# Altium PCB PCB3.PcbDoc
Units mil, origin at the board's own origin, x right, y up, seen from the top; angles counter-clockwise.
Board outline 3937.01 x 3149.61 mil, 2 copper layers (Top Layer, Bottom Layer); 68 components, 73 nets, 259 pads, 40 vias.
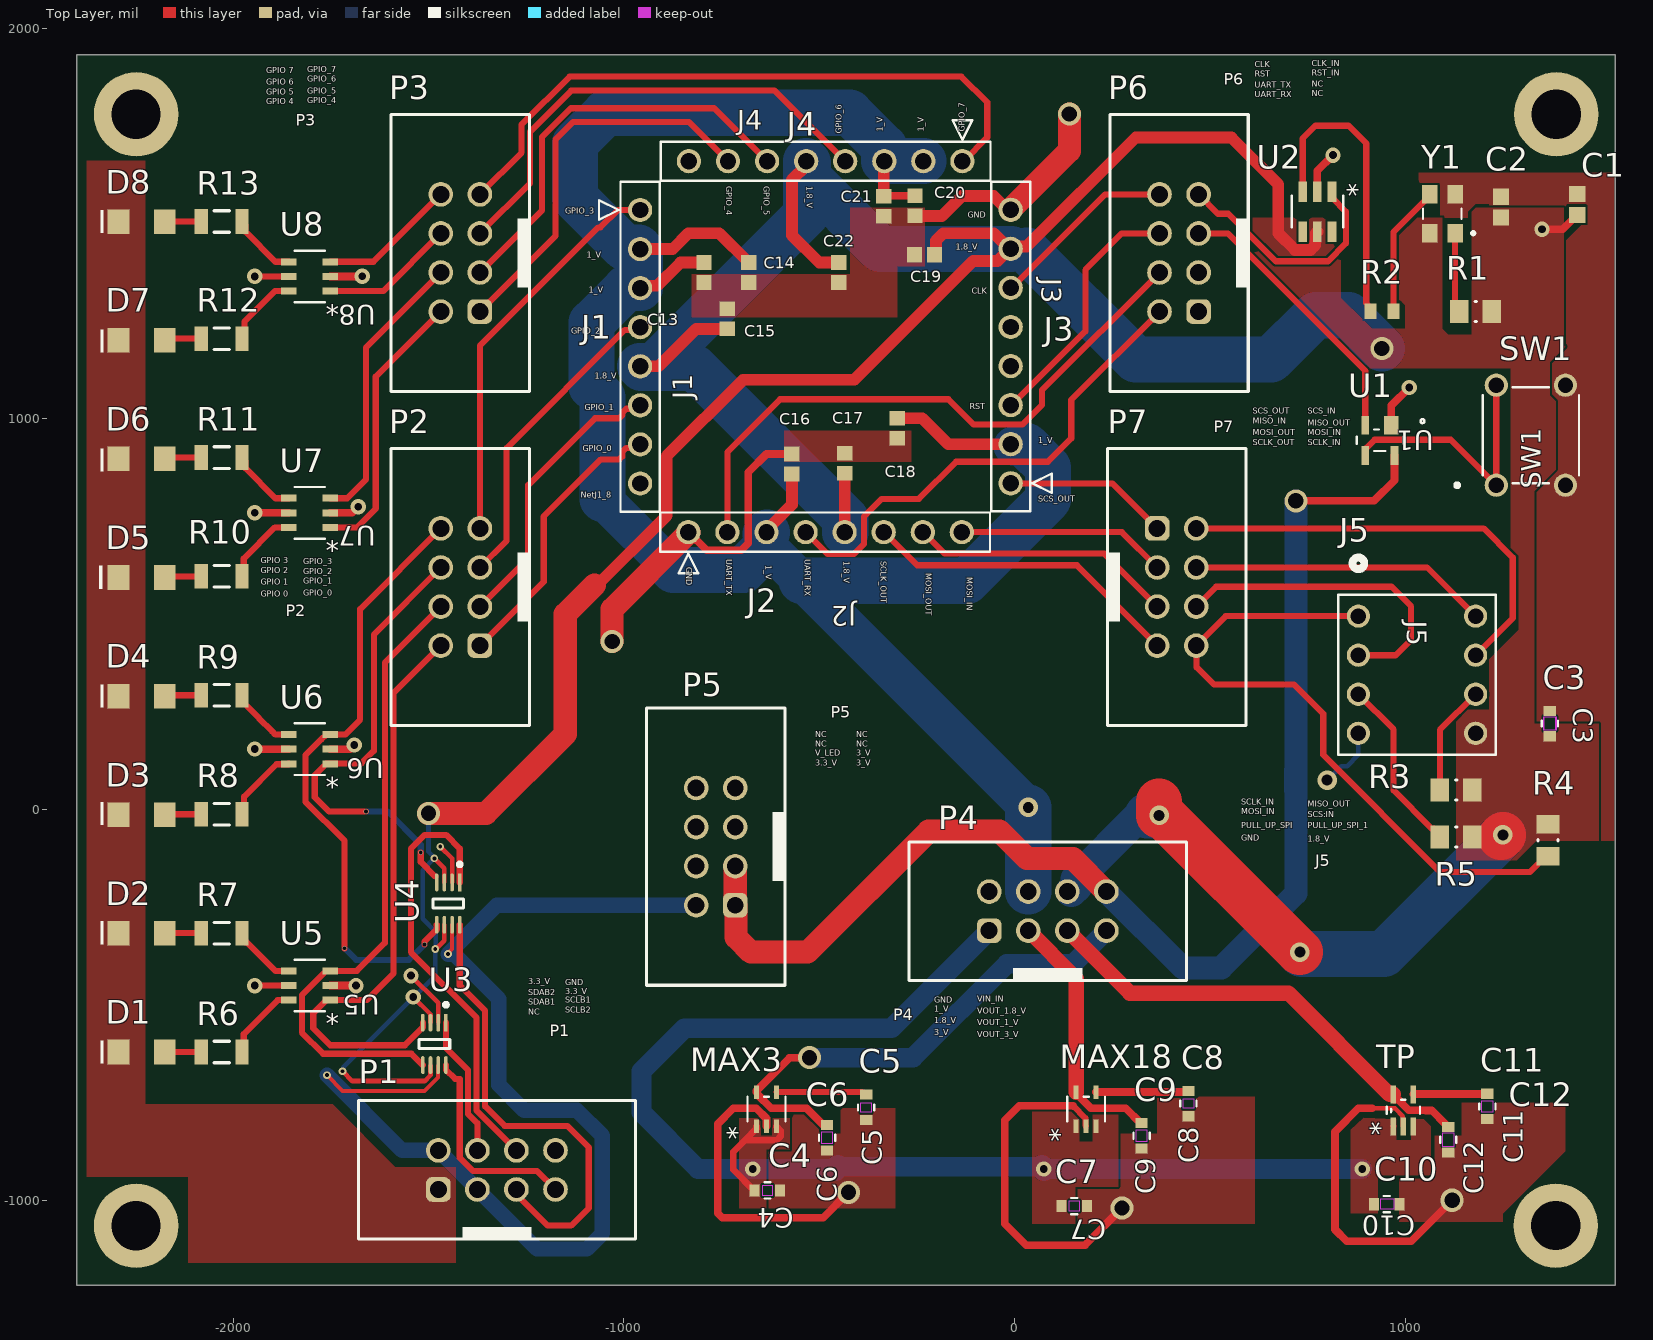
[diagram p0: Top Layer view]
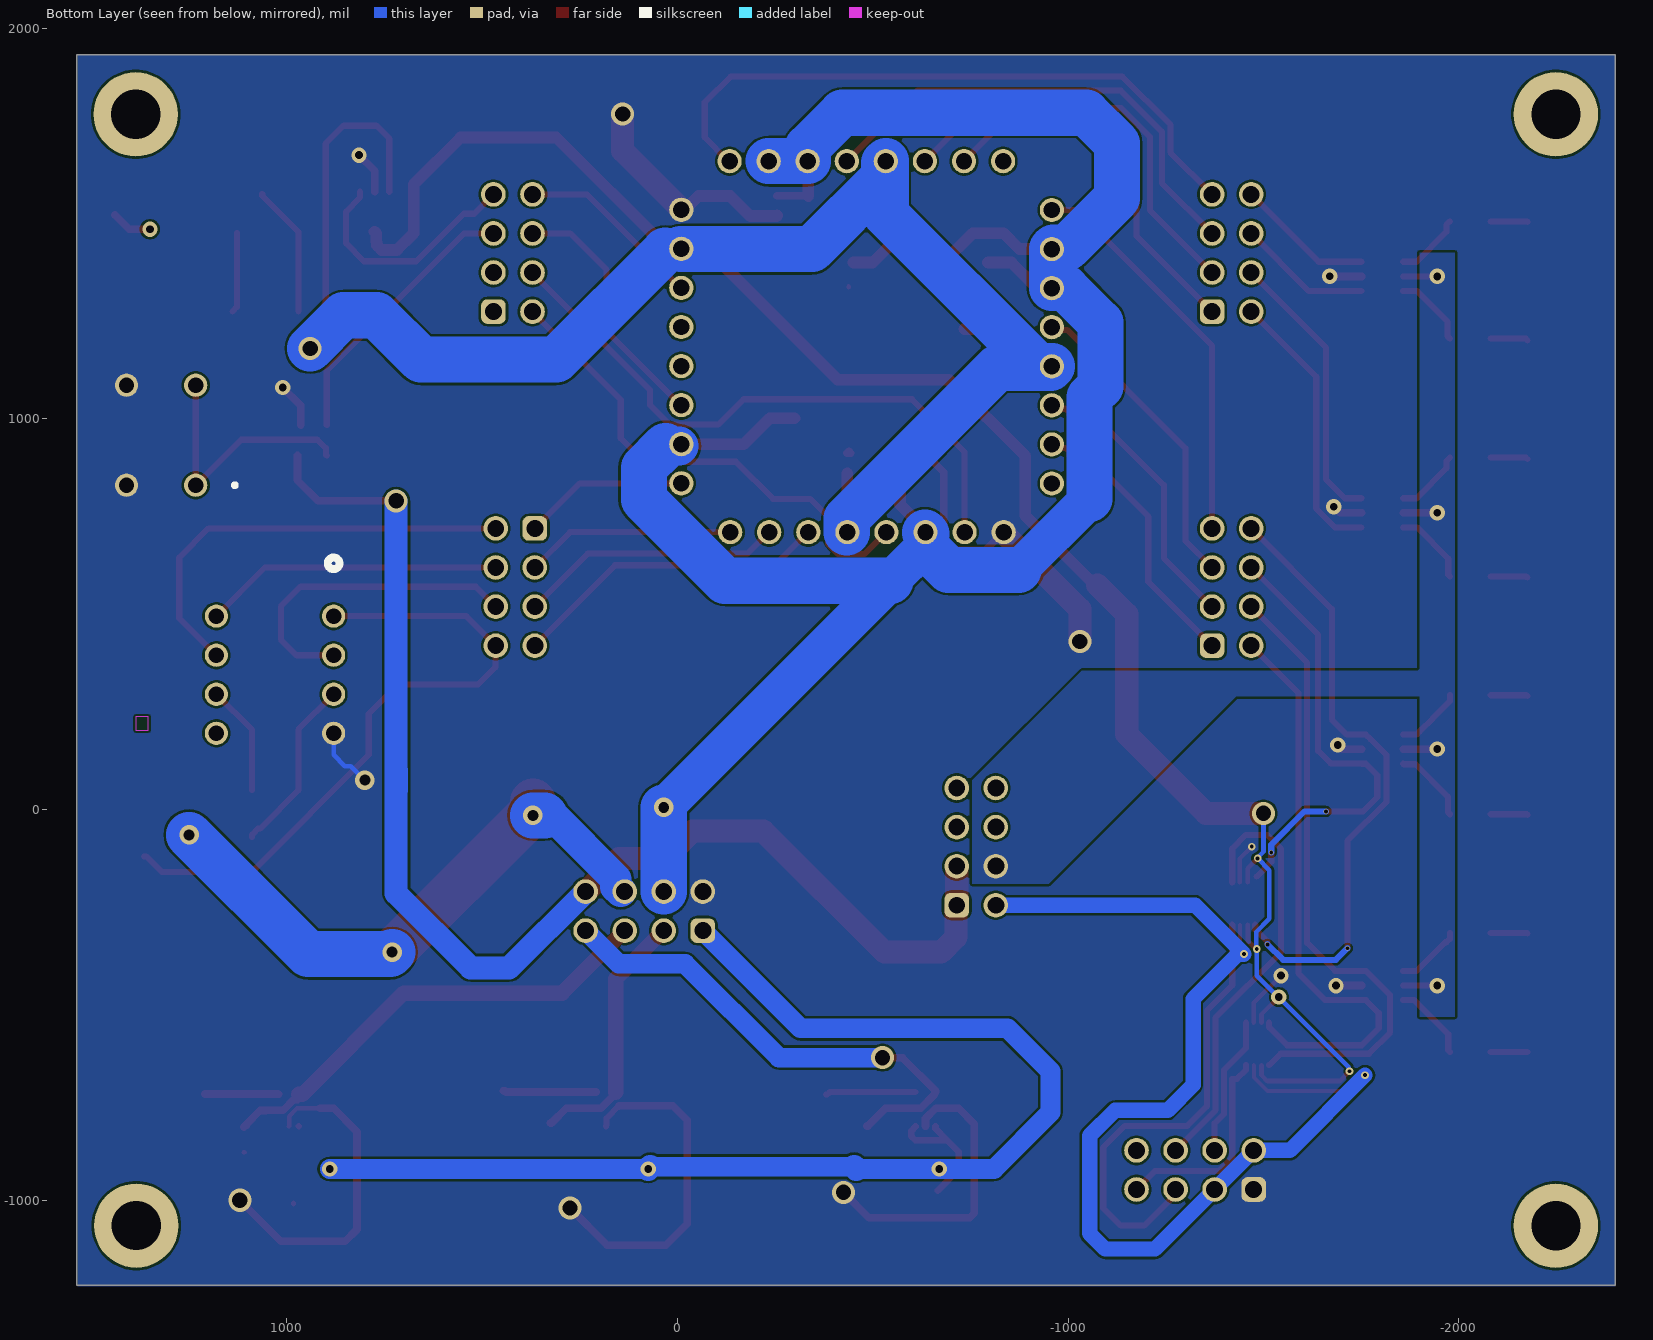
[diagram p1: Bottom Layer view, seen from below]
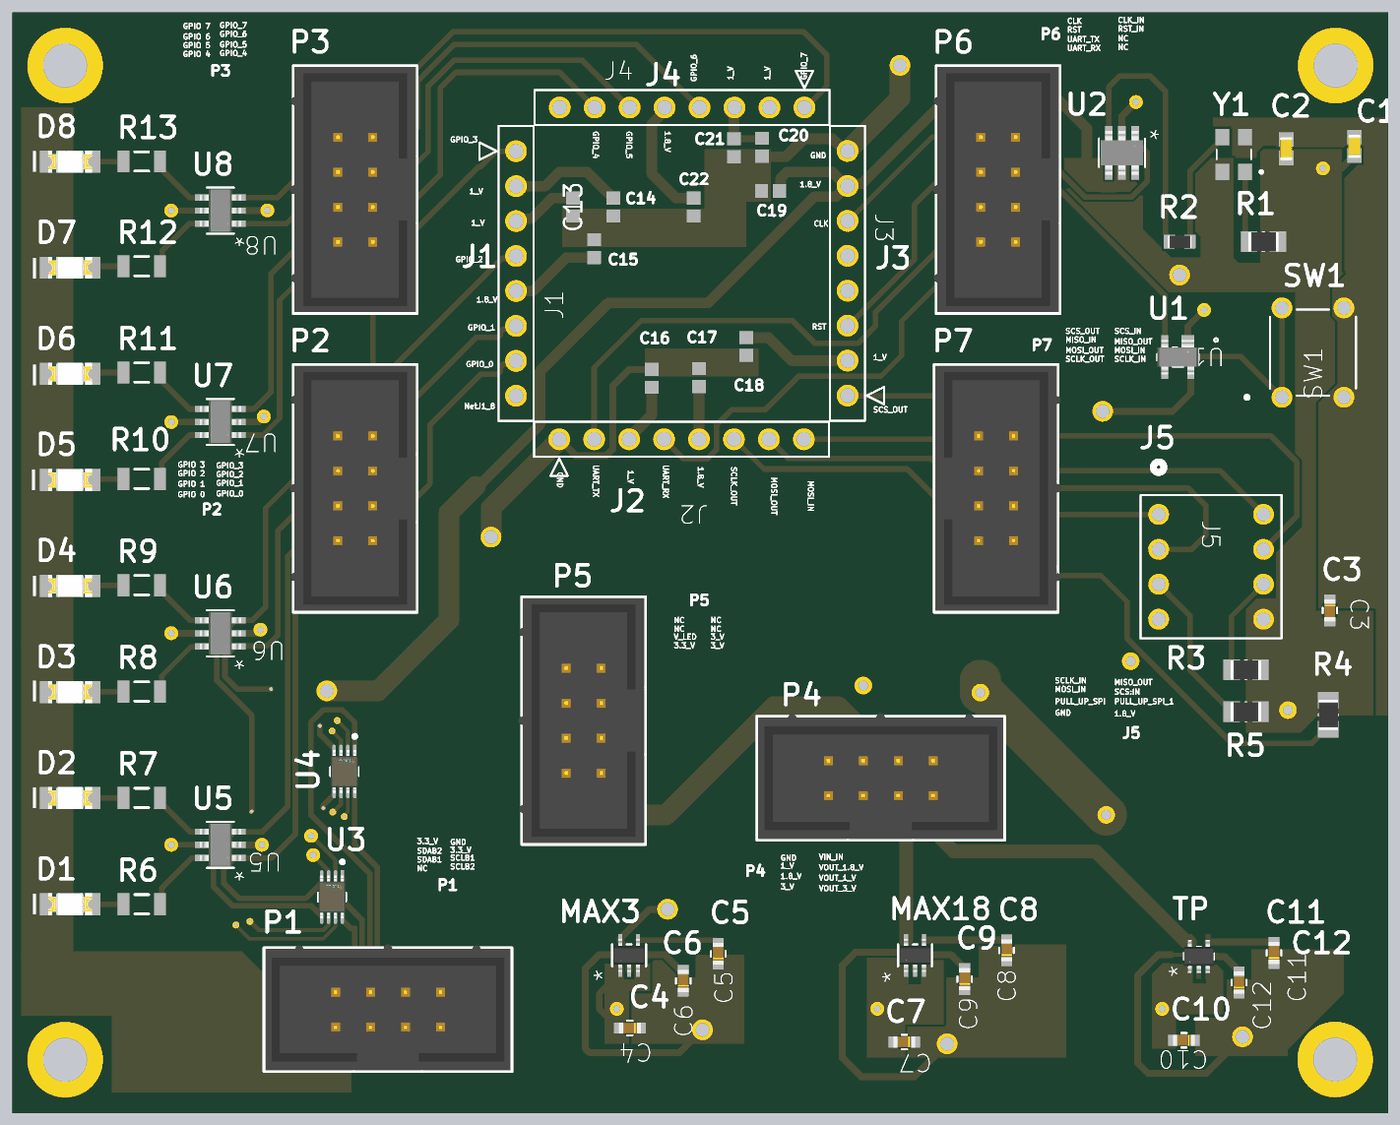
[diagram p2: 3D render of the assembled board from above, using the file's embedded part models]

## Layer stack, top to bottom
Top Solder: solder mask 0.4, Solder Resist, Dk 3.5
Top Layer: signal copper 1.4
Dielectric 1: dielectric 12.6, FR-4, Dk 4.8
Bottom Layer: signal copper 1.4
Bottom Solder: solder mask 0.4, Solder Resist, Dk 3.5

## Board outline
-2400,-1218.19 1537.01,-1218.19 1537.01,1931.42 -2400,1931.42

## Design rules (kind name [scope] priority, off if disabled: settings)
Clearance Clearance_1 [All] p1 off: gap=5.91 ignorepadtopadclearanceinfootprint=FALSE
ComponentClearance [All] p1: gap=0 collisioncheckmode=3 verticalgap=0 showdistances=FALSE
HoleSize [All] p1: absolutevalues=TRUE maxlimit=157.48 minlimit=1 maxpercent=80.000 minpercent=20.000
PolygonConnect [All] p1: connectstyle=Direct reliefconductorwidth=10 reliefentries=4 polygonreliefangle="90 Angle" airgapwidth=10
RoutingVias [All] p1: holewidth=28 width=50 viastyle="Through Hole" minholewidth=28 minwidth=50 maxholewidth=28 maxwidth=50
SilkToSilkClearance [All] p1: silktosilkclearance=0
SolderMaskExpansion [All] p1: expansion=0 istentingtop=FALSE
SupplyNets "Schematic Supply Nets" [InNet('GND')] p1: voltage=0.000
Width Width_8 [InNet('3.3V')] p1: maxlimit=118.11 minlimit=10 preferedwidth=10
Width Width_7 [InNet('Vin_in')] p2: maxlimit=118.11 minlimit=7.87 preferedwidth=19.68
Width Width_6 [InNet('VDD_+3.3V')] p3: maxlimit=118.11 minlimit=7.87 preferedwidth=19.68
Width Width_5 [InNet('VCC')] p4: maxlimit=118.11 minlimit=7.87 preferedwidth=19.68
Width Width_4 [InNet('3V')] p5: maxlimit=118.11 minlimit=7.87 preferedwidth=19.68
Width Width_3 [InNet('1V')] p6: maxlimit=118.11 minlimit=7.87 preferedwidth=19.68
Width Width_2 [InNet('1.8V')] p7: maxlimit=118.11 minlimit=7.87 preferedwidth=19.68
Width Width_1 [InNet('GND')] p8: maxlimit=118.11 minlimit=7.87 preferedwidth=19.68
Width [All] p9: maxlimit=118.11 minlimit=15.75 preferedwidth=15.75
27 further rules are at their usual default settings.

## Classes and differential pairs
component class U_SPI: C3 J5 R3 R4 R5
component class U_Reset: SW1 U1
component class U_Power: C4 C5 C6 C7 C8 C9 C10 C11 C12 MAX3 MAX18 TP
component class U_MONITOR: P4 P5 P6
component class U_LCD: D1 D2 D3 D4 D5 D6 D7 D8 P1 P2 P3 R6 R7 R8 R9 R10 R11 R12 R13 U3 U4 U5 U6 U7 U8
component class U_Header: C13 C14 C15 C16 C17 C18 C19 C20 C21 C22 J1 J2 J3 J4
component class U_CLOCK: C1 C2 R1 R2 U2 Y1
component class "TOP_SCHEMATIC (1)": P7

## Components (designator, comment, footprint, x,y, rotation, side; value= is the part's Value field where it differs from the comment)
C1 "Capacitor 0.1 uF" CAPC1608X90X40ML10T20 1440,1548.43 r90 top value="0.1 uF"
C2 "Capacitor 0.1 uF" CAPC1608X90X40ML10T20 1245,1541.57 r90 top value="0.1 uF"
C3 "CL10C120JB8NNNC" CAP_CL10_SAM#1 1370,220 r270 top
C4 "1uF" CAP_CL10_SAM#2 -632.59,-975 r180 top
C5 "10nF" CAP_CL10_SAM#2 -380,-762.41 r90 top
C6 "1uF" CAP_CL10_SAM#2 -480,-840 r90 top
C7 "1uF" CAP_CL10_SAM#2 152.41,-1015 r180 top
C8 "10nF" CAP_CL10_SAM#2 445,-752.59 r90 top
C9 "1uF" CAP_CL10_SAM#2 325,-835 r90 top
C10 "1uF" CAP_CL10_SAM#2 952.41,-1010 r180 top
C11 "10nF" CAP_CL10_SAM#2 1210,-760 r90 top
C12 "1uF" CAP_CL10_SAM#3 1110,-845 r90 top
C13 "VJ0603Y104KXQCW1BC" CAPC1608X95X40NL15T15 -795,1374.41 r270 top
C14 "VJ0603Y104KXQCW1BC" CAPC1608X95X40NL15T15 -680,1374.41 r270 top
C15 "VJ0603Y104KXQCW1BC" CAPC1608X95X40NL15T15 -735,1255.59 r90 top
C16 "VJ0603Y104KXQCW1BC" CAPC1608X95X40NL15T15 -570,884.41 r90 top
C17 "VJ0603Y104KXQCW1BC" CAPC1608X95X40NL15T15 -434.63,886.61 r90 top
C18 "VJ0603Y104KXQCW1BC" CAPC1608X95X40NL15T15 -300,975.59 r270 top
C19 "VJ0603Y104KXQCW1BC" CAPC1608X95X40NL15T15 -230.59,1420 r180 top
C20 "VJ0603Y104KXQCW1BC" CAPC1608X95X40NL15T15 -255,1545.59 r270 top
C21 "VJ0603Y104KXQCW1BC" CAPC1608X95X40NL15T15 -335,1544.41 r270 top
C22 "VJ0603Y104KXQCW1BC" CAPC1608X95X40NL15T15 -450,1374.41 r270 top
D1 "150120BS75000" WL-SMCW_1206_150120xx75000 -2234.45,-620.59 r0 top
D2 "150120BS75000" WL-SMCW_1206_150120xx75000 -2234.45,-317.02 r0 top
D3 "150120BS75000" WL-SMCW_1206_150120xx75000 -2234.45,-13.45 r0 top
D4 "150120BS75000" WL-SMCW_1206_150120xx75000 -2234.45,290.12 r0 top
D5 "150120BS75000" WL-SMCW_1206_150120xx75000 -2234.45,593.7 r0 top
D6 "150120BS75000" WL-SMCW_1206_150120xx75000 -2234.45,897.27 r0 top
D7 "150120BS75000" WL-SMCW_1206_150120xx75000 -2234.45,1200.84 r0 top
D8 "150120BS75000" WL-SMCW_1206_150120xx75000 -2234.45,1504.41 r0 top
J1 "PPTC081LFBN-RC" CONN_PPTC081LFBN-RC_SUL -958.5,1534.41 r90 top
J2 "PPTC081LFBN-RC" CONN_PPTC081LFBN-RC_SUL -835,710 r180 top
J3 "PPTC081LFBN-RC" CONN_PPTC081LFBN-RC_SUL -10,835 r270 top
J4 "PPTC081LFBN-RC" CONN_PPTC081LFBN-RC_SUL -133.5,1659.41 r0 top
J5 "1-2199298-2" CONN8_1-2199298-2_TEC 880,495 r270 top
MAX3 "MAX8510EXK30+T" 21-0076E_MXM -635,-767 r90 top
MAX18 "MAX8510EXK18+T" 21-0076E_MXM 183,-767 r90 top
P1 "61200821621" 61200821621 -1325,-922.48 r0 top
P2 "61200821621" 61200821621 -1418.5,569.41 r90 top
P3 "61200821621" 61200821621 -1418.5,1424.41 r90 top
P4 "61200821621" 61200821621 85,-260 r0 top
P5 "61200821621" 61200821621 -765,-95 r90 top
P6 "61200821621" 61200821621 420.91,1424.41 r90 top
P7 "61200821621" 61200821621 415,569.41 r270 top
R1 "Resistor 10k +/-1% 0805 125 mW" RESC2013X50X35ML15T15 1180,1275 r180 top value=10k
R2 "Resistor 50 +/-1% 0603 100 mW" RESC1608X55X25ML10T15 940.47,1275 r0 top value=50
R3 "Resistor 10k +/-1% 0805 125 mW" RESC2013X50X35ML15T15 1130,50 r180 top value=10k
R4 "Resistor 10k +/-1% 0805 125 mW" RESC2013X50X35ML15T15 1365,-78.66 r270 top value=10k
R5 "Resistor 10k +/-1% 0805 125 mW" RESC2013X50X35ML15T15 1130,-70 r180 top value=10k
R6 "RC1206FR-10750RL" RESC3116X65X40LL10T20 -2029.45,-620.59 r180 top
R7 "RC1206FR-10750RL" RESC3116X65X40LL10T20 -2029.45,-316.3 r180 top
R8 "RC1206FR-10750RL" RESC3116X65X40LL10T20 -2029.45,-12.02 r180 top
R9 "RC1206FR-10750RL" RESC3116X65X40LL10T20 -2029.45,292.27 r180 top
R10 "RC1206FR-10750RL" RESC3116X65X40LL10T20 -2029.45,596.55 r180 top
R11 "RC1206FR-10750RL" RESC3116X65X40LL10T20 -2029.45,900.84 r180 top
R12 "RC1206FR-10750RL" RESC3116X65X40LL10T20 -2029.45,1205.12 r180 top
R13 "RC1206FR-10750RL" RESC3116X65X40LL10T20 -2029.45,1505 r180 top
SW1 "B3F-1000" SW_B3F-1000_OMR 1232.83,830 r90 top
TP "TPS71710DCKT" DCK5 995,-770 r90 top
U1 "APX811-31UG-7" APX811-31UG-7_DIO 935,945 r180 top
U2 "PL133-37TI-R" SOT-23-6_MC_MCH 775,1530 r270 top
U3 "TCA9406DCUR" FP-DCU0008A-IPC_B -1485,-600 r270 top
U4 "TCA9406DCUR" FP-DCU0008A-IPC_B -1449.53,-240.83 r270 top
U5 "74LVC2G17GV,125" SC-74;TSOP6_NEX -1804.45,-450.59 r180 top
U6 "74LVC2G17GV,125" SC-74;TSOP6_NEX -1804.45,154.41 r180 top
U7 "74LVC2G17GV,125" SC-74;TSOP6_NEX -1804.45,759.41 r180 top
U8 "74LVC2G17GV,125" SC-74;TSOP6_NEX -1804.45,1364.41 r180 top
Y1 "ASE3-20.000MHZ-KT" XTAL_ASE3-20.000MHZ-KT 1095,1525 r180 top

## Footprints (in the part's own frame and the unit in brackets; to place one, negate y for a bottom-side part, rotate by r counter-clockwise, add the part's x,y. Pads: shape width x height; smd on the part's side, far side on the other; paste and mask are expansions set on the pad)
21-0076E_MXM [mil]
  rect 34.5x12 smd paste+0 mask+0: 1(-43.75,25.59) 2(-43.75,0) 3(-43.75,-25.59) 4(43.75,-25.59) 5(43.75,25.59)
  silkscreen extent -32,-48 32,48, body extent -47,-44 47,44, height 43
61200821621 [mm] "8 pins, straight, gold plating"
  rrect50% 1.6x1.6 hole 1.1: 1(-3.81,-1.27)
  round 1.6 hole 1.1: 2(-3.81,1.27) 3(-1.27,-1.27) 4(-1.27,1.27) 5(1.27,-1.27) 6(1.27,1.27) 7(3.81,-1.27) 8(3.81,1.27)
  silkscreen extent -9.01,-4.5 9.01,4.5, body extent -8.91,-4.42 8.91,4.75, height 9.13
APX811-31UG-7_DIO [mil]
  rect 37x47.56 smd paste+0 mask+0: 1(-29,-39)
  rect 20x47.56 smd paste+0 mask+0: 2(37.5,-39) 3(37.5,39) 4(-37.5,39)
  silkscreen extent -114,-54 59,28, body extent -59,-49 59,49, height 39
CAP_CL10_SAM#1 [mm]
  rect 0.656x0.8 smd paste+0 mask+0: 1(-0.828,0) 2(0.828,0)
  Top Layer keep-out region: -0.449,-0.349 -0.449,0.349 0.449,0.349 0.449,-0.349
  Keep-Out Layer region: -0.449,-0.4 -0.449,0.4 0.449,0.4 0.449,-0.4
  silkscreen extent -0.19,-0.53 0.19,0.53, body extent -0.8,-0.4 0.8,0.4, height 0.9
CAP_CL10_SAM#2 [mm]
  rect 0.656x0.8 smd paste+0 mask+0: 1(-0.828,0) 2(0.828,0)
  Top Layer keep-out region: -0.32,-0.349 -0.32,0.349 0.315,0.349 0.315,-0.349
  silkscreen extent -0.19,-0.53 0.19,0.53, body extent -0.8,-0.4 0.8,0.4, height 0.9
CAP_CL10_SAM#3 [mm]
  rect 0.656x0.8 smd paste+0 mask+0: 1(-0.828,0) 2(0.828,0)
  Top Layer keep-out region: -0.449,-0.349 -0.449,0.349 0.449,0.349 0.449,-0.349
  silkscreen extent -0.19,-0.53 0.19,0.53, body extent -0.8,-0.4 0.8,0.4, height 0.9
CAPC1608X90X40ML10T20 [mm] "Chip Capacitor, 2-Leads, Body 1.70x0.90mm, IPC Low Density"
  rect 1.05x1.05 smd: 1(-0.675,0) 2(0.675,0)
  body extent -0.85,-0.45 0.85,0.45, height 0.9
CAPC1608X95X40NL15T15 [mm] "Chip Capacitor, 2-Leads, Body 1.60x0.80mm, IPC Medium Density"
  rect 0.95x1 smd: 1(-0.65,0) 2(0.65,0)
  body extent -0.88,-0.48 0.87,0.47, height 0.95
CONN8_1-2199298-2_TEC [mm]
  round 1.508 hole 1 paste-2539.97 mask+0: 1(0,0) 2(2.54,0) 3(5.08,0) 4(7.62,0) 5(0,7.62) 6(2.54,7.62) 7(5.08,7.62) 8(7.62,7.62)
  silkscreen extent -3.81,-1.32 9.02,8.94
CONN_PPTC081LFBN-RC_SUL [mil]
  round 62 hole 42 paste-99999 mask+0: 1(0,0) 2(-100,0) 3(-200,0) 4(-300,0) 5(-400,0) 6(-500,0) 7(-600,0) 8(-700,0)
  silkscreen extent -772,-50 72,105
DCK5 [mil]
  rect 46x14 smd paste-23 mask-23: 1(-41,25.59) 2(-41,0) 3(-41,-25.59) 4(41,-25.59) 5(41,25.59)
  silkscreen extent -9,-42 28,42, body extent -47,-43 47,43, height 43
FP-DCU0008A-IPC_B [mm]
  rect 1.16x0.237 smd paste+0 mask+0: 1(-1.376,0.75)
  rrect100% 1.16x0.237 smd paste+0 mask+0: 2(-1.376,0.25) 3(-1.376,-0.25) 4(-1.376,-0.75) 5(1.376,-0.75) 6(1.376,-0.25) 7(1.376,0.25) 8(1.376,0.75)
  silkscreen extent -2.67,-1 0.3,1, body extent -2.21,-1.25 2.21,1.25, height 0.25
RESC1608X55X25ML10T15 [mm] "Chip Resistor, 2-Leads, Body 1.70x0.90mm, IPC Low Density"
  rect 0.8x1 smd: 1(-0.75,0) 2(0.75,0)
  body extent -0.85,-0.45 0.85,0.45, height 0.55
RESC2013X50X35ML15T15 [mm] "Chip Resistor, 2-Leads, Body 2.2x1.4mm, IPC Low Density"
  rect 1.2x1.5 smd: 1(-1.05,0) 2(1.05,0)
  silkscreen extent -0.05,-0.65 0.05,0.65, body extent -1.1,-0.7 1.1,0.7, height 0.5
RESC3116X65X40LL10T20 [mm] "Chip Resistor, 2-Leads, Body 3.10x1.60mm, IPC High Density"
  rect 0.85x1.6 smd: 1(-1.325,0) 2(1.325,0)
  silkscreen extent -0.5,-0.7 0.5,0.7, body extent -1.6,-0.85 1.6,0.85, height 0.65
SC-74;TSOP6_NEX [mm]
  rect 0.998x0.456 smd paste+0 mask+0: 1(-1.35,0.95) 2(-1.35,0) 3(-1.35,-0.95) 4(1.35,-0.95) 5(1.35,0) 6(1.35,0.95)
  silkscreen extent -0.98,-1.68 0.98,1.68, body extent -1.5,-1.55 1.5,1.55, height 1.09
SOT-23-6_MC_MCH [mil]
  rect 52x22 smd paste+0 mask+0: 1(-51,37.4) 2(-51,0) 3(-51,-37.4) 4(51,-37.4) 5(51,0) 6(51,37.4)
  silkscreen extent -41,-66 41,66, body extent -63,-61 63,61, height 57
SW_B3F-1000_OMR [mm]
  round 1.508 hole 1 paste-2539.97 mask+0: 1(0,0) 2(6.5,0) 3(0,-4.5) 4(6.5,-4.5)
  silkscreen extent -0.13,-5.38 6.38,2.67
WL-SMCW_1206_150120xx75000 [mm] "SMD Mono-color Chip LED, body 3.2x1.6mm"
  rect 1.4x1.6 smd: 1(-1.5,0) 2(1.5,0)
  silkscreen extent -2.68,-0.75 -2.48,0.75, body extent -1.6,-0.8 1.6,0.8, height 0.68
XTAL_ASE3-20.000MHZ-KT [mm]
  rect 1x1.2 smd: 1(-0.825,1.27) 2(-0.825,-1.27) 3(0.825,-1.27) 4(0.825,1.27)
  silkscreen extent -2.1,-0.35 1.25,1.37

## Part data
C1 C2: library part CMP-001-00014-6, "Chip Capacitor, 0.1 uF 0603", Capacitor Type=Ceramic, Case/Package=0603, Max Operating Temperature=125°C, Min Operating Temperature=-55°C, Tolerance=5%, Voltage Rating=50V, Mounting Technology=SM, Pins=2, RoHS Compliant=True
C3: "No Description Available", Manufacturer_Name=Samsung, Copyright="Copyright (C) 2026 Ultra Librarian. All rights reserved.", Manufacturer_Part_Number=CL10C120JB8NNNC
C4 C5 C6 C7 C8 C9 C10 C11 C12: library part CL10C120JB8NNNC, "No Description Available", Manufacturer_Name=Samsung, Copyright="Copyright (C) 2026 Ultra Librarian. All rights reserved.", Manufacturer_Part_Number=CL10C120JB8NNNC
C13 C14 C15 C16 C17 C18 C19 C20 C21 C22: library part CMP-2006-01550-1, Manufacturer=Vitramon, Part Number=VJ0603Y104KXQCW1BC
D1 D2 D3 D4 D5 D6 D7 D8: library part CMP-1426-00015-4, "Wurth Elektronik LED, WL-SMCW, 3216 (1206), 470 nm, 3.2 x 1.6 x 0.68mm", Case Code (Imperial)=1206, Case Code (Metric)=3216, Color=Blue, Forward Current=100mA, Forward Voltage=3.2V, Manufacturer Lifecycle Status=ACTIVE, Manufacturer Package Identifier=LED_1206, Max Operating Temperature=85°C, Max Reverse Voltage (DC)=5V, Min Operating Temperature=-40°C, Test Current=20mA, Case/Package=1206, Dominant Wavelength=470nm, Height=680µm, Length=3.2mm, Lens Style="Clear, Rectangular", Lifecycle Status=Production, Luminous Intensity=145mcd, Mount="Surface Mount", Packaging="Tape and Reel", Peak Wavelength=465nm, REACH SVHC=Unknown, RoHS=Compliant, Viewing Angle=140°, Wavelength=470nm, Width=1.6mm, YEOL="1 = Estimated lifetime > 10 years"
J1 J2 J3 J4: "Description", Manufacturer_Name=Sullins, Copyright="Copyright (C) 2026 Ultra Librarian. All rights reserved.", Manufacturer_Part_Number=PPTC081LFBN-RC, RefDes=RefDes, Type=Type
J5: "8P,DIP SKT,300 CL,LDR,PB FREE", Manufacturer_Name="TE Connectivity", Copyright="Copyright (C) 2026 Ultra Librarian. All rights reserved.", Manufacturer_Part_Number=1-2199298-2, RefDes=RefDes, Type=DIP
MAX3: "Ultra-Low-Noise, High PSRR, Low-Dropout, 120mA Linear Regulators", Manufacturer_Name="Analog Devices Inc", Copyright="Copyright (C) 2026 Ultra Librarian. All rights reserved.", Manufacturer_Part_Number=MAX8510EXK30+T, RefDes=RefDes, Type=Type
MAX18: library part MAX8510EXK30+T, "Ultra-Low-Noise, High PSRR, Low-Dropout, 120mA Linear Regulators", Manufacturer_Name="Analog Devices Inc", Copyright="Copyright (C) 2026 Ultra Librarian. All rights reserved.", Manufacturer_Part_Number=MAX8510EXK30+T, RefDes=RefDes, Type=Type
P1 P2 P3 P4 P5 P6 P7: library part CMP-1502-00006-3, "Wr-bhd; 2.54MM Pitch 8 Way 2 Row Shrouded Straight Pcb Header, Surface Mount", Color=Black, Contact Resistance=20mΩ, Current Rating=3A, Insulation Resistance=1GΩ, Max Operating Temperature=105°C, Min Operating Temperature=-40°C, Operating Supply Voltage=250V, Connector Type="Male Pin", Contact Material=Copper, Contact Plating=Gold, Gender=Male, Insulation Material=PBT, Lead Pitch=2.54mm, Length=17.82mm, Mount="Through Hole", Number of Contacts=8, Number of Pins=8, Number of Positions=8, Number of Rows=2, Orientation=Vertical, Pitch=2.54mm, RoHS=Compliant, Row Spacing=2.54mm, Termination=Solder
R1 R3 R4 R5: library part CMP-009-00018-5, "Chip Resistor, 10 KOhm, +/- 1%, 125 mW, -55 to 155 degC, 0805 (2012 Metric)", Case/Package=0805, Max Operating Temperature=155°C, Min Operating Temperature=-55°C, Power=125mW, Tolerance=1%, Voltage Rating=150V, Mounting Technology=SM, Pins=2, RoHS Compliant=True
R2: library part CMP-009-00017-5, "Chip Resistor, 50 Ohm 0603", Case/Package=0603, Max Operating Temperature=155°C, Min Operating Temperature=-55°C, Power=100mW, Tolerance=1%, Voltage Rating=50V, Mounting Technology=SM, Pins=2, RoHS Compliant=True
R6 R7 R8 R9 R10 R11 R12 R13: library part CMP-2003-04964-1, Manufacturer=Yageo, Part Number=RC1206FR-10750RL
SW1: "Description", Manufacturer_Name=Omron, Copyright="Copyright (C) 2026 Ultra Librarian. All rights reserved.", Manufacturer_Part_Number=B3F-1000, RefDes=RefDes, Type=Type
TP: "150-mA, high-PSRR, low-IQ, low-dropout voltage regulator with enable 5-SC70 -40 to 125", Manufacturer_Name="Texas Instruments", Copyright="Copyright (C) 2026 Ultra Librarian. All rights reserved.", Datasheet=https://www.ti.com/lit/gpn/tps717, Manufacturer_Part_Number=TPS71710DCKT, RefDes=RefDes, Type=Type
U1: "No Description Available", Manufacturer_Name="Diodes Inc", Copyright="Copyright (C) 2026 Ultra Librarian. All rights reserved.", Manufacturer_Part_Number=APX811-31UG-7, RefDes=RefDes, Type=Type
U2: "Description", Manufacturer_Name=Microchip, Copyright="Copyright (C) 2025 Ultra Librarian. All rights reserved.", Manufacturer_Part_Number=PL133-37TI-R, RefDes=RefDes, Type=Type
U3 U4: library part CMP-0314-00417-3, "IC TRNSLTR BIDIRECTIONAL US8", Case/Package=VSSOP, High Level Output Current=-50mA, Low Level Output Current=50mA, Max Operating Temperature=85°C, Max Supply Voltage=5.5V, Min Operating Temperature=-40°C, Min Supply Voltage=1.65V, Package Quantity=1, Contact Plating=Gold, Data Rate=24Mbps, Height=0.8mm, Lead Free="Lead Free", Length=2.1mm, Logic Function=Translator, Number of Bits=2, Number of Channels=2, Number of Outputs=2, Number of Pins=8, Output Type=Voltage, Packaging="Tape and Reel", Propagation Delay=4.4ns, Radiation Hardening=No, REACH SVHC="No SVHC", Turn-On Delay Time=260ns, Weight=0.00067oz, Width=2.4mm
U5 U6 U7 U8: "Description", Manufacturer_Name=Nexperia, Copyright="Copyright (C) 2026 Ultra Librarian. All rights reserved.", Manufacturer_Part_Number=74LVC2G17GV,125, RefDes=RefDes, Type=Logic
Y1: Package=None, Availability=Unavailable, MP=ASE3-20.000MHZ-KT, Price=None

## Free pads (board coordinates)
  round 216 hole 126 unplated: H1(-2248.5,1779.41) H2(1386.5,1779.41) H3(1385,-1065) H4(-2248.5,-1065.59)

## Via types
v1: diameter 39.37, hole 19.68, Top Layer to Bottom Layer, 16 vias
v2: diameter 59.06, hole 39.37, Top Layer to Bottom Layer, 9 vias
v3: diameter 19.68, hole 10, Top Layer to Bottom Layer, 6 vias
v4: diameter 50, hole 28, Top Layer to Bottom Layer, 5 vias
v5: diameter 11.81, hole 10, Top Layer to Bottom Layer, 4 vias

## Nets (pads, with @x,y where several pads share a name; then routed paths per layer and width w, separated by ;. In a path a pad name is that pad's centre, name@x,y a point inside that pad or via, vN(x,y) a via of type N, cw(c..) or ccw(c..) an arc to the next point about the centre after c; other vN are vias at no path point)
1.8V: C1.1 C2.1 C3.2 C15.1 C17.1 C19.1 C22.1 J1.5 J2.5 J3.7 J4.5 J5.8 P4.6 R1.1 R3.1 R4.1 R5.1 U2.5 U3.3 U3.6 U4.3 U4.6 Y1.4 | length 10613.7
  Top Layer w11.81: v3(-1719.95,-669.95) -1719.95,-670.05 -1695,-695 -1510,-695 -1494.84,-679.84 U3.6 ; v1(-1538.88,-480) -1494.84,-524.04 U3.3 ; v3(-1485,-125) -1459.37,-150.63 U4.3 ; v3(-1482.9,-356.84) -1481.39,-355.33 -1479.15,-355.33 -1459.37,-335.56 U4.6
  Top Layer w19.68: J4.5@-533.5,1647.96 J4.5 ; J2.5 J2.5@-434.81,710.19 ; C17.1@-434.81,860.84 C17.1 ; v1(1350,1485) 1403.15,1485 C1.1
  Top Layer w30.11: -1080.49,561.8 -890,752.29 -890,905 -695,1100 -410,1100 -105.96,1404.04 -43.58,1404.04 -15.08,1432.54 -15.08,1436.5 -53.58,1475 -182.36,1475 -201.35,1456.01 -201.35,1423.65 C19.1 ; J1.5 -910.59,1134.41 -815,1230 C15.1 ; J4.5@-533.5,1647.96 -570,1611.46 -570,1470 -500,1400 C22.1 ; J2.5@-434.81,710.19 C17.1@-434.81,860.84 ; J3.7 -3.9,1441.1 31.1,1441.1 310,1720 555,1720 675,1600 675,1474.96 717.92,1432.04 757.28,1432.04 769.56,1444.32 769.56,1452.12 770.95,1453.5 770.95,1474.95 U2.5
  Top Layer w59.06: v2(-1500,-10) -1352.91,-10 -1150,192.91 -1150,500 -1075,575
  Top Layer w118.11: 370,20 v4(370,-15) 380,-15 v4(730,-365) ; v4@1245,-70 v4(1250,-65)
  Bottom Layer w11.81: v3(-1719.95,-669.95) -1718.49,-668.49 -1718.49,-659.61 v1(-1538.88,-480) ; v1@-1537.94,-480 -1482.9,-424.96 v3(-1482.9,-356.84) ; v2@-1500,-5 v2(-1500,-10) -1500,-107.87 -1485,-122.87 v3(-1485,-125) -1515,-155 -1515,-280 -1481.39,-313.61 v3@-1481.39,-356.83
  Bottom Layer w80.11: P4.6@145,-210 157.54,-197.46 157.54,-177.92 320.46,-15 340,-15
  Bottom Layer w118.11: J2.5@-433.5,709.41 -433.5,745.12 -818.76,1130.37 -954.46,1130.37 J1.5 -922.8,1134.41 -533.5,1523.7 J4.5 -529.46,1655.37 -529.46,1619.66 -344.21,1434.41 J3.7@-8.5,1434.41 ; 31.24,1430.37 310,1151.61 656.61,1151.61 770,1265 855,1265 v2(940,1180) ; 340,-15 v4(370,-15) ; v4(730,-365) 735,-370 945,-370 v4(1250,-65)
1V: C13.1 C14.1 C16.1 C18.1 C20.1 C21.1 J1.2 J1.3 J2.3 J3.2 J4.2 J4.3 P4.4 | length 5889.6
  Top Layer w19.68: J1.3 J1.3@-952.17,1340.75 ; C21.1 -334.41,1570.59 -255.59,1570.59 C20.1 ; J4.3@-333.5,1651.73 J4.3 ; J4.2@-234.25,1658.66 J4.2
  Top Layer w30.11: J1.2 -875.59,1434.41 -835,1475 -755.98,1475 -680.98,1400 C14.1 ; J1.3@-952.17,1340.75 -951.93,1340.51 -929.85,1340.51 -929.62,1340.75 -914.25,1340.75 -855,1400 C13.1 ; J2.3 -635,715 -570,780 -570,857.83 C16.1@-570.98,858.82 ; C21.1 -335,1653.23 J4.3@-333.5,1651.73 ; C18.1 -236.18,1001.18 -170,935 J3.2
  Bottom Layer w100.11: -1054.46,794.66 -873.25,613.45 ; -637.54,669.66 J2.3@-637.54,705.37 ; -629.46,669.66 -545.2,585.39 v4(35,5.2) ; J3.2@-4.46,930.37 30.34,930.37
  Bottom Layer w118.11: -1054.46,794.66 -1054.46,1054.99 -1082.52,1083.04 -1082.52,1246.1 -994.21,1334.41 J1.3 J1.2 -962.54,1438.45 -998.25,1438.45 -1125,1565.2 -1125,1705 -1046.57,1783.43 -421.81,1783.43 -333.5,1695.12 J4.3 J4.2 ; -873.25,613.45 -693.76,613.45 -637.54,669.66 ; J2.3@-637.54,705.37 J2.3@-633.5,709.41 ; -545.2,585.39 -121.81,585.39 85.96,793.17 85.96,874.75 30.34,930.37 ; P4.4 v4(35,5.2)
3.3V: P1.2 P1.3 P5.2 U3.7 U4.7 | length 2985.3
  Top Layer w10: v3(-1760,-680) -1720,-720 -1510,-720 -1475.5,-685.5 -1475.5,-654.51 U3.7 ; v3(-1450,-370) -1450,-367.38 -1439.69,-357.06 U4.7
  Bottom Layer w39.37: v3(-1760,-680) -1567.52,-872.48 P1.2 P1.3 -1222.48,-1125 -1095,-1125 -1055,-1085 -1055,-835 -1120,-770 -1255,-770 -1320,-705 -1320,-485 -1435,-370 v3(-1450,-370) -1325,-245 P5.2
3V: P4.8 P5.1 P5.3 U1.4 | length 3327
  Top Layer w19.68: v2(720,790) 920,790 972.5,842.5 U1.4
  Top Layer w59.06: P5.3 P5.1 -713.03,-246.97 -713.03,-326.97 -675,-365 -530,-365 -220.24,-55.24 -38.19,-55.24 32.3,-125.73 149.66,-125.73 233.93,-210 P4.8
  Bottom Layer w59.06: P4.8 430.54,-405.54 529.46,-405.54 720,-215 720,49.53 719.57,49.97 719.57,100.03 720,100.47 v2(720,790)
BP2: C8.2 MAX18.4 | length 237.8
  Top Layer w19.68: MAX18.4 438.91,-723.25 442.16,-720 C8.2
CLK: J3.6 P6.8 | length 478.8
  Top Layer w15.75: J3.6@-8.5,1334.41 231.5,1574.41 P6.8
CLK_in: P6.7 U2.1 | length 613.6
  Top Layer w15.75: P6.7 520.32,1525 547,1525 668.79,1403.21 802.21,1403.21 847.83,1448.83 847.83,1530.57 812.4,1566 U2.1
FIN: R2.1 U2.3 | length 765.6
  Top Layer w15.75: U2.3 737.6,1717.6 770,1750 855,1750 900,1705 900,1296.04 903.07,1292.97 903.07,1286.81 910.94,1278.94 R2.1
GND: C1.2 C2.2 C3.1 C4.1 C5.1 C6.1 C7.1 C8.1 C9.1 C10.1 C11.1 C12.1 C13.2 C14.2 C15.2 C16.2 C17.2 C18.2 C19.2 C20.2 C21.2 C22.2 D1.1 D2.1 D3.1 D4.1 D5.1 D6.1 D7.1 D8.1 J2.1 J3.8 J5.4 MAX3.2 MAX18.2 P1.1 P4.2 SW1.3 SW1.4 TP.2 U1.1 U2.2 U3.2 U4.2 U5.2 U6.2 U7.2 U8.2 Y1.2 | length 4888.7
  Top Layer w11.81: v1(-1545,-425) -1475.16,-494.84 U3.2 ; v3(-1470,-95) -1439.69,-125.31 U4.2 ; C22.2@-438.19,1337.05 C22.2@-438.19,1338.98 ; 915,-765 973.7,-765 993.91,-785.21 993.91,-809.91 TP.2 ; C10.1@982.59,-1010 C10.1@982.59,-1007.16 ; C12.1@1107.16,-877.59 C12.1
  Top Layer w15.75: 150,-758.68 181.13,-789.81 181.13,-808.88 MAX18.2
  Top Layer w19.68: U5.2 v1(-1685.59,-450.59) v1@-1685,-450 ; U6.2 -1700.59,154.41 v1(-1690,165) ; U7.2 -1695.59,759.41 v1(-1680,775) ; U8.2 -1670.59,1364.41 v1(-1670,1365) ; J2.1 -833.96,708.96 -788.25,663.25 -700.03,663.25 -681.75,681.53 -681.75,863.25 -635,910 C16.2 ; MAX3.2 -635,-790.82 -660.82,-765 -720,-765 -760,-805 -760,-1033.47 -748.47,-1045 -490,-1045 v2(-425,-980) ; C17.2@-443.44,912.2 C17.2 ; C17.2@-439.03,916.61 C17.2 ; C17.2@-433.64,912.2 C17.2 ; 150,-758.68 149.14,-757.82 12.18,-757.82 -25,-795 -25,-1060 30,-1115 180,-1115 v2(275,-1020) ; U2.2 775,1635 v1(815,1675) ; 915,-765 880,-765 820,-825 820,-1075 850,-1105 1015,-1105 v2(1120,-1000) ; U1.1 964,1034 v1(1010,1080)
  Top Layer w30.11: C20.2 -253.82,1518.82 -186.18,1518.82 -135,1570 -53.63,1570 -18.63,1535 J3.8
  Top Layer w59.06: v2(-1030,430) -1030,512.91 J2.1@-833.96,708.96 ; J3.8 -10,1535.8 140,1685.8 v2(140,1780)
  Bottom Layer w11.81: v4(800,75) 836.05,111.05 851.26,111.05 880,139.78 J5.4
"GPIO 0": P2.2 U3.4 U5.1 | length 1504.7
  Top Layer w15.75: U3.4 -1514.53,-557.58 -1560.29,-603.35 -1751.65,-603.35 -1795,-560 -1795,-521.03 -1761.96,-487.99 U5.1 -1657.99,-487.99 -1590,-420 -1590,297.91 P2.2
"GPIO 1": P2.4 U3.5 U5.3 | length 1627.9
  Top Layer w15.75: U3.5 -1543.7,-625 -1770,-625 -1824.17,-570.83 -1824.17,-475.34 -1776.66,-427.83 -1776.6,-427.83 -1761.96,-413.19 U5.3 -1683.19,-413.19 -1611.65,-341.65 -1611.65,376.26 P2.4
"GPIO 2": P2.6 U4.4 U6.1 | length 1192.9
  Top Layer w15.75: v5(-1660,-5) -1755,-5 -1791.37,31.37 -1791.37,87.6 -1761.96,117.01 U6.1 -1750.2,118.12 -1671.88,118.12 -1640,150 -1640,447.91 P2.6 ; v5(-1520,-110) -1520,-133.96 U4.4@-1482.27,-171.69
  Bottom Layer w15.75: v5(-1660,-5) -1605,-5 -1520,-90 v5(-1520,-110)
"GPIO 3": P2.8 U4.5 U6.3 | length 1584.8
  Top Layer w15.75: v5(-1715,-355) -1715,-80 -1815,20 -1815,138.83 -1774.26,179.57 -1774.21,179.57 -1761.96,191.81 U6.3 -1713.19,191.81 -1675,230 -1675,512.91 P2.8 ; v5(-1510,-345) -1510,-337.7 -1479.06,-306.75 U4.5
  Bottom Layer w15.75: v5(-1715,-355) -1685,-385 -1550,-385 v5(-1510,-345)
"GPIO 4": P3.2 U7.1 | length 709.6
  Top Layer w15.75: U7.1 -1682.99,722.01 -1635,770 -1635,1107.91 P3.2
"GPIO 5": P3.4 U7.3 | length 720
  Top Layer w15.75: U7.3 -1708.19,796.81 -1660,845 -1660,1182.91 P3.4
"GPIO 6": P3.6 U8.1 | length 343.9
  Top Layer w15.75: U8.1 -1615.9,1327.01 P3.6
"GPIO 7": P3.8 U8.3 | length 354.3
  Top Layer w15.75: U8.3 -1641.1,1401.81 P3.8
GPIO_0: J1.7 P2.1 | length 727.7
  Top Layer w15.75: P2.1 -1205,582.91 -1205,750 -1058.78,896.22 -1011.82,896.22 -1003.75,904.29 -1003.75,915.45 -993.64,925.56 -967.35,925.56 J1.7
GPIO_1: J1.6 P2.3 | length 736.5
  Top Layer w15.75: P2.3 -1245,642.91 -1245,830 -1073.78,1001.22 -1011.82,1001.22 -1003.75,1009.29 -1003.75,1015.45 -993.64,1025.56 -967.35,1025.56 J1.6
GPIO_2: J1.4 P2.5 | length 803.6
  Top Layer w15.75: P2.5 -1300,687.91 -1300,925 -997.42,1227.58 -965.34,1227.58 J1.4
GPIO_3: J1.1 P2.7 | length 1021.4
  Top Layer w15.75: P2.7 -1368.5,1186.88 -1065.38,1490 -1060,1490 -1015.59,1534.41 J1.1
GPIO_4: J4.7 P3.1 | length 1022.5
  Top Layer w15.75: P3.1 -1175,1467.91 -1175,1715 -1130,1760 -834.09,1760 J4.7
GPIO_5: J4.6 P3.3 | length 1075.4
  Top Layer w15.75: P3.3 -1210,1532.91 -1210,1720.78 -1135.77,1795 -769.09,1795 J4.6
GPIO_6: J4.4 P3.5 | length 1238.6
  Top Layer w15.75: P3.5 -1240,1602.91 -1240,1735 -1135,1840 -614.09,1840 J4.4
GPIO_7: J4.1 P3.7 | length 1671.5
  Top Layer w15.75: P3.7 -1261.65,1681.26 -1261.65,1753.35 -1138.98,1876.02 -136.02,1876.02 -70,1810 -70,1720.11 -130.7,1659.41 J4.1
Maip_NC: J3.4
MISO_in: J2.8 P7.3 | length 536.3
  Top Layer w15.75: J2.8@-133.5,709.41 -132.91,710 274.41,710 P7.3
MISO_out: J5.5 P7.4 | length 766.5
  Top Layer w15.75: P7.4 1055.59,619.41 J5.5
MOSI_in: J5.2 P7.6 | length 828.2
  Top Layer w15.75: P7.6 515.59,570 965,570 1015,520 1015,435 975,395 J5.2
MOSI_out: J2.7 P7.5 | length 677.2
  Top Layer w15.75: J2.7@-233.5,709.41 -179.09,655 229.41,655 P7.5
NC_0: J4.8
NetD1_2: D1.2 R6.2 | length 93.8
  Top Layer w15.75: D1.2 R6.2
NetD2_2: D2.2 R7.2 | length 94.1
  Top Layer w15.75: D2.2 -2174.68,-316.3 R7.2
NetD3_2: D3.2 R8.2 | length 94.4
  Top Layer w15.75: D3.2 -2173.97,-12.02 R8.2
NetD4_2: D4.2 R9.2 | length 94.7
  Top Layer w15.75: D4.2 -2173.25,292.27 R9.2
NetD5_2: D5.2 R10.2 | length 95
  Top Layer w15.75: D5.2 -2172.54,596.55 R10.2
NetD6_2: D6.2 R11.2 | length 95.3
  Top Layer w15.75: D6.2 -2171.82,900.84 R11.2
NetD7_2: D7.2 R12.2 | length 95.6
  Top Layer w15.75: D7.2 -2171.11,1205.12 R12.2
NetD8_2: D8.2 R13.2 | length 94
  Top Layer w15.75: D8.2 -2174.8,1505 R13.2
NetJ1_8: J1.8
NetR1_2: R1.2 Y1.1 | length 204.6
  Top Layer w15.75: Y1.1 1127.48,1286.18 R1.2
NetR2_2: R2.2 Y1.3 | length 338.3
  Top Layer w15.75: R2.2 970,1478.54 1062.52,1571.06 Y1.3
NetR6_1: R6.1 U5.6 | length 198.7
  Top Layer w15.75: R6.1 -1972.76,-616.06 -1972.76,-574.98 -1885.77,-487.99 U5.6
NetR7_1: R7.1 U5.4 | length 168.5
  Top Layer w15.75: R7.1 -1977.28,-331.07 -1968.43,-339.93 -1965.07,-339.93 -1891.81,-413.19 U5.4
NetR8_1: R8.1 U6.6 | length 196.4
  Top Layer w15.75: R8.1 -1972.08,-6.82 -1972.08,32.92 -1889.1,115.9 -1858.7,115.9 U6.6
NetR9_1: R9.1 U6.4 | length 170.1
  Top Layer w15.75: R9.1 -1977.28,277.5 -1934.2,234.42 -1934.2,234.2 -1899.98,199.98 -1891.81,191.81 U6.4
NetR10_1: R10.1 U7.6 | length 195.8
  Top Layer w15.75: R10.1 -1972.8,601.04 -1972.8,642.2 -1892.99,722.01 U7.6
NetR11_1: R11.1 U7.4 | length 173.7
  Top Layer w15.75: R11.1 -1968.43,891.98 -1968.43,873.43 -1891.81,796.81 U7.4
NetR12_1: R12.1 U8.6 | length 192.2
  Top Layer w15.75: R12.1 -1971.01,1211.4 -1971.01,1248.99 -1892.99,1327.01 U8.6
NetR13_1: R13.1 U8.4 | length 172.8
  Top Layer w15.75: R13.1 -1968.43,1496.14 -1968.43,1478.43 -1891.81,1401.81 U8.4
NetSW1_1: SW1.1 SW1.2 U1.3 | length 665.9
  Top Layer w15.75: U1.3 899.63,908.13 899.63,924.63 921.44,946.44 1116.39,946.44 SW1.1 SW1.2
NR/FB: C11.2 TP.4 | length 190.1
  Top Layer w19.68: TP.4 1021.39,-728.2 1209.2,-728.2 C11.2
POC_CTRL_NC: J3.5
Pull_up_SPI: J5.3 R5.2 | length 454.9
  Top Layer w15.75: J5.3 970,205 970,48.66 1067.01,-48.35 1072.91,-48.35 1088.66,-64.09 R5.2
Pull_up_SPI_1: J5.7 R3.2 | length 282.8
  Top Layer w15.75: R3.2 1088.66,203.66 J5.7
RST: J3.3 P6.6 | length 653.7
  Top Layer w15.75: J3.3@-8.5,1034.41 181.11,1224.02 181.11,1381.11 274.41,1474.41 P6.6
RST_IN: P6.5 U1.2 | length 710.9
  Top Layer w15.75: P6.5 545.59,1474.41 897.5,1122.5 U1.2
SCLB1: P1.5 U4.8 | length 1204.9
  Top Layer w15.75: U4.8 -1420,-450 -1355.32,-514.68 -1355.32,-759.68 -1305,-810 -1145,-810 -1090,-865 -1090,-1020 -1135,-1065 -1195.26,-1065 -1275,-985.26 P1.5
SCLB2: P1.7 U3.8 | length 537.5
  Top Layer w15.75: U3.8 -1455.47,-665.92 -1432.03,-689.37 -1420.28,-689.37 -1420.28,-891.23 -1386.51,-925 -1222.48,-925 P1.7
SCLK_in: J5.1 P7.8 R4.2 | length 1696.3
  Top Layer w15.75: J5.1 540.59,495 P7.8 465.71,418.7 465.71,364.29 510,320 715,320 790,245 790,140 1090,-160 1319.09,-160 1359.09,-120 R4.2
SCLK_out: J2.6 P7.7 | length 818.6
  Top Layer w15.75: J2.6@-333.5,709.41 -249.09,625 159.41,625 P7.7
SCS_in: J5.6 P7.2 | length 1130.2
  Top Layer w15.75: P7.2 1200.59,719.41 1275,645 1275,490 J5.6
SCS_out: J3.1 P7.1 | length 421.1
  Top Layer w15.75: J3.1@-8.5,834.41 250,834.41 P7.1
SDAB1: P1.6 U4.1 | length 1125
  Top Layer w15.75: U4.1 -1420,-100 -1455,-65 -1510,-65 -1545,-100 -1545,-365 -1376.97,-533.03 -1376.97,-770.51 P1.6
SDAB2: P1.4 U3.1 | length 360
  Top Layer w15.75: U3.1 -1455.47,-609.91 -1398.62,-666.76 -1398.62,-779.48 -1375,-803.1 P1.4
UART_RX: J2.4 P6.2 | length 1285
  Top Layer w15.75: J2.4 -478.78,653.78 -411.22,653.78 -385,680 -385,750 -340,795 -245,795 -149.78,890.22 85.22,890.22 145,950 145,1048.5 P6.2
UART_TX: J2.2 P6.4 | length 1577.6
  Top Layer w15.75: J2.2 -735,915 -600,1050 -169.49,1050 -104.49,985 20,985 70,1035 70,1073.5 P6.4
V_LED: P5.4 U5.5 U6.5 U7.5 U8.5 | length 360.1
  Top Layer w15.75: v1(-1945,-450.59) U5.5 ; v1(-1945,1364.41) U8.5
  Top Layer w19.68: v1@-1955,760 -1954.41,759.41 U7.5 ; v1(-1945,155) -1944.41,154.41 U6.5
  other v1: -1945,759.41
Vin_in: C4.2 C7.2 C10.2 MAX3.1 MAX3.3 MAX18.1 MAX18.3 P4.1 TP.1 TP.3 | length 3395.7
  Top Layer w17.11: C4.2@-666.64,-975 -720.15,-921.49 -720.15,-876.45 -690.37,-846.67 ; MAX3.1 -660.59,-816.89 -690.37,-846.67 ; MAX3.3 -609.41,-811.76 -598.7,-822.47 -598.7,-836.65 -608.72,-846.67 -690.37,-846.67 ; v1@890,-924.5 v1(890,-920)
  Bottom Layer w50.63: -457.98,-920 v1(-670,-920) -810,-920 -955,-775 -955,-670 -845,-560 -315,-560 P4.1 ; -452.23,-914.25 v1@69.25,-914.25 ; v1(75,-920) v1(890,-920)
  Bottom Layer w60.63: -457.98,-920 -452.23,-914.25 ; v1@69.25,-914.25 v1(75,-920)
"Vout 1.8V": C9.2 MAX18.5 P4.3 | length 662.9
  Top Layer w19.68: MAX18.5@157.41,-726.81 195.6,-765 284.75,-765 322.16,-802.41 C9.2
  Top Layer w39.37: P4.3 157.41,-432.41 MAX18.5
Vout_1V: C12.2 P4.5 TP.5 | length 1176.5
  Top Layer w19.68: TP.5@972.25,-742.16 981.48,-742.16 1009.32,-770 1052.37,-770 1052.56,-770.18 1067.77,-770.18 1104.09,-806.5 1104.09,-809.35 1106.94,-809.35 C12.2
  Top Layer w39.37: P4.5 295,-470 701.04,-470 960.04,-729 TP.5
Vout_3V: C6.2 MAX3.5 P4.7 | length 1273.4
  Top Layer w19.68: MAX3.5 -660.59,-719.68 -575.91,-635 v2(-525,-635) ; MAX3.5@-656.75,-730.66 -622.41,-765 -532.66,-765 -487.84,-809.82 C6.2@-485,-809.82
  Bottom Layer w50.05: v2(-525,-635) -260,-635 -20,-395 150,-395 P4.7
VP: C5.2 MAX3.4 | length 232.1
  Top Layer w15.75: MAX3.4 -389.41,-723.25 -382.84,-729.82 C5.2
pads on no net: P1.8 P5.5 P5.6 P5.7 P5.8 P6.1 P6.3 U2.4 U2.6

## Polygon pours and split planes (outlines as drawn)
GND on Top Layer "GND_L01_P036" (solid, remove dead copper, pour order 36): -590,970 -590,890 -265,890 -265,970
GND on Top Layer "GND_L01_P037" (solid, remove dead copper, pour order 37): -230,1540 -230,1390 -300,1390 -300,1360 -420,1360 -420,1540
GND on Top Layer "GND_L01_P035" (solid, remove dead copper, pour order 35): -826.25,1370 -826.25,1260 -300,1260 -300,1370
Vin_in on Top Layer "VIN_IN_L01_P010" (solid, pour order 10): 930,-1033.82 860.57,-1033.82 860.57,-820 893.18,-788.82 977.05,-793.27 977.05,-846.73 1015,-846.73 1015,-793.27 1046.93,-793.27 1065.57,-811.09 1065.57,-935.82 930,-935.82
Vin_in on Top Layer "VIN_IN_L01_P007" (solid, pour order 7): 155,-1060 45,-1060 45,-770 145,-770 165,-790 165,-850 200,-850 200,-780 265,-780 265,-965 155,-965
GND on Top Layer "GND_L01_P014" (solid, pour order 14): 1035,1600 1090,1600 1090,1520 1095,1515 1160,1515 1160,1530 1180,1550 1215,1550 1215,1540.67 1214.33,1540 1405,1540 1415,1550 1465,1550 1465,1510 1405,1450 1405,1190 1410,1185 1370,1145 1370,1060 1385,1045 1385,870 1330,815 1330,220 1495,220 1495,-80 1535,-80 1535,1630 1035,1630
1.8V on Top Layer "1.8V_L01_P013" (solid, pour order 13): 1130,225 1130,-130 1285,-130 1335,-80 1495,-80 1495,220 1330,220 1330,815 1385,870 1385,1045 1370,1060 1370,1145 1410,1185 1405,1190 1405,1540 1180,1540 1170,1530 1170,1215 1110,1215 1095,1230 1095,1515 1030,1515 985,1470 985,1305 1000,1290 1000,1230 915,1230 835,1310 835,1515 610,1515 610,1425 905,1130 1270,1130 1270,670 1290,650 1290,460 1215,385 1215,255 1160,255
GND on Top Layer "GND_L01_P012" (solid, pour order 12): -2375,1660 -2225,1660 -2225,-755 -1745,-755 -1585,-915 -1430,-915 -1430,-1160 -2115,-1160 -2115,-940 -2375,-940
GND on Top Layer "GND_L01_P011" (solid, pour order 11): 985,-1055 1250,-1055 1250,-1035 1410,-875 1410,-750 1145,-750 1145,-835 1075,-835 1075,-945 985,-945
GND on Top Layer "GND_L01_P009" (solid, pour order 9): 155,-1060 615,-1060 615,-735 370,-735 365,-740 365,-830 265,-830 265,-965 155,-965
Vin_in on Top Layer "VIN_IN_L01_P000" (solid, pour order 0): -575,-790 -575,-870 -635,-870 -635,-1020 -705,-1020 -705,-790 -650,-790 -650,-835 -620,-835 -620,-790
GND on Top Layer "GND_L01_P003" (solid, pour order 3): -635,-1020 -305,-1020 -305,-765 -440,-765 -445,-770 -445,-830 -485,-830 -540,-775 -650,-775 -650,-835 -620,-835 -620,-790 -575,-790 -575,-870 -635,-870
GND on Bottom Layer "GND_L02_P026" (solid, pour order 26): -2400,1930 1535,1930 1535,-1220 -2400,-1220
V_LED on Bottom Layer "V_LED_L02_P024" (solid, pour order 24): -1900,-530 -1990,-530 -1990,1425 -1900,1425 -1900,360 -1895,355 -1035,355 -755,75 -755,-190 -950,-190 -1430,290 -1900,290

## Silkscreen, mask and mechanical layers (free items; w line width, h text height)
Top Overlay:
  text "CLK_IN" at 760,1902.5 h15
  text "CLK" at 615,1900 h15
  text "GPIO_7" at -1810,1887.5 h15
  text "GPIO 7" at -1915,1885 h15
  text "RST_IN" at 760,1877.5 h15
  text "RST" at 615,1875 h15
  text "GPIO_6" at -1810,1862.5 h15
  text "GPIO 6" at -1915,1855 h15
  text "P6" at 535,1855 h30
  text "NC" at 760,1850 h15
  text "UART_TX" at 615,1847.5 h15
  text "GPIO_5" at -1810,1832.5 h15
  text "GPIO 5" at -1915,1830 h15
  text "NC" at 760,1825 h15
  text "UART_RX" at 615,1822.5 h15
  text "GPIO_4" at -1810,1807.5 h15
  text "GPIO 4" at -1915,1805 h15
  text "P3" at -1840,1750 h30
  text "1_V" at -337.5,1735 h15 r90
  text "1_V" at -232.5,1735 h15 r90
  text "GPIO_7" at -127.5,1735 h15 r90
  text "GPIO_6" at -442.5,1730 h15 r90
  text "GPIO_4" at -737.5,1595 h15 r270
  text "GPIO_5" at -642.5,1595 h15 r270
  text "1.8_V" at -532.5,1595 h15 r270
  text "GPIO_3" at -1150,1525 h15
  text "GND" at -120,1515 h15
  text "1.8_V" at -150,1432.5 h15
  text "1_V" at -1095,1412.5 h15
  text "1_V" at -1090,1322.5 h15
  text "CLK" at -110,1320 h15
  text "GPIO_2" at -1135,1217.5 h15
  text "1.8_V" at -1075,1102.5 h15
  text "RST" at -115,1025 h15
  text "GPIO_1" at -1100,1022.5 h15
  text "SCS_OUT" at 610,1012.5 h15
  text "SCS_IN" at 750,1012.5 h15
  text "MISO_IN" at 610,987.5 h15
  text "MISO_OUT" at 750,982.5 h15
  text "P7" at 510,965 h30
  text "MOSI_OUT" at 610,957.5 h15
  text "MOSI_IN" at 750,957.5 h15
  text "1_V" at 60,937.5 h15
  text "SCLK_OUT" at 610,932.5 h15
  text "SCLK_IN" at 750,932.5 h15
  text "GPIO_0" at -1105,917.5 h15
  text "NetJ1_8" at -1110,797.5 h15
  text "SCS_OUT" at 60,787.5 h15
  text "UART_TX" at -737.5,640 h15 r270
  text "UART_RX" at -537.5,640 h15 r270
  text "1.8_V" at -437.5,635 h15 r270
  text "SCLK_OUT" at -342.5,635 h15 r270
  text "GPIO 3" at -1930,630 h15
  text "GPIO_3" at -1820,627.5 h15
  text "1_V" at -637.5,625 h15 r270
  text "GND" at -840,620 h15 r270
  text "GPIO 2" at -1930,605 h15
  text "MOSI_OUT" at -227.5,605 h15 r270
  text "GPIO_2" at -1820,602.5 h15
  text "MOSI_IN" at -122.5,595 h15 r270
  text "GPIO_1" at -1820,577.5 h15
  text "GPIO 1" at -1930,575 h15
  text "GPIO_0" at -1820,547.5 h15
  text "GPIO 0" at -1930,545 h15
  text "P2" at -1865,495 h30
  text "P5" at -470,235 h30
  text "NC" at -510,185 h15
  text "NC" at -405,185 h15
  text "NC" at -510,160 h15
  text "NC" at -405,160 h15
  text "V_LED" at -510,137.5 h15
  text "3_V" at -405,137.5 h15
  text "3.3_V" at -510,112.5 h15
  text "3_V" at -405,112.5 h15
  text "SCLK_IN" at 580,12.5 h15
  text "MISO_OUT" at 750,7.5 h15
  text "MOSI_IN" at 580,-12.5 h15
  text "SCS:IN" at 750,-20 h15
  text "PULL_UP_SPI" at 580,-47.5 h15
  text "PULL_UP_SPI_1" at 750,-47.5 h15
  text "GND" at 580,-80 h15
  text "1.8_V" at 750,-82.5 h15
  text "J5" at 770,-145 h30
  text "3.3_V" at -1245,-447.5 h15
  text "GND" at -1150,-450 h15
  text "3.3_V" at -1150,-472.5 h15
  text "SDAB2" at -1245,-475 h15
  text "VIN_IN" at -95,-492.5 h15
  text "SCLB1" at -1150,-495 h15
  text "GND" at -205,-495 h15
  text "SDAB1" at -1245,-500 h15
  text "1_V" at -205,-517.5 h15
  text "SCLB2" at -1150,-520 h15
  text "VOUT_1.8_V" at -95,-522.5 h15
  text "NC" at -1245,-525 h15
  text "P4" at -310,-540 h30
  text "1.8_V" at -205,-547.5 h15
  text "VOUT_1_V" at -95,-552.5 h15
  text "3_V" at -205,-577.5 h15
  text "P1" at -1190,-580 h30
  text "VOUT_3_V" at -95,-582.5 h15
Mechanical 1:
  the board outline again, w10

## Text inside footprints (layer, text, board x,y; h text height)
MAX3: Top Overlay "*" at -685,-845 h50 r90; Mechanical 13 "*" at -629.59,-796 h50 r90
MAX18: Top Overlay "*" at 140,-850 h50 r90; Mechanical 13 "*" at 188.41,-796 h50 r90
TP: Top Overlay "*" at 960.41,-833.5 h50 r90; Mechanical 13 "*" at 960.41,-833.5 h50 r90
U2: Top Overlay "*" at 829.4,1603.5 h50 r270; Mechanical 13 "*" at 783,1563 h50 r270
U5: Top Overlay "*" at -1728.81,-500.96 h50 r180; Mechanical 13 "*" at -1773.45,-458.59 h50 r180
U6: Top Overlay "*" at -1728.81,104.04 h50 r180; Mechanical 13 "*" at -1773.45,146.41 h50 r180
U7: Top Overlay "*" at -1728.81,709.04 h50 r180; Mechanical 13 "*" at -1773.45,751.41 h50 r180
U8: Top Overlay "*" at -1728.81,1314.04 h50 r180; Mechanical 13 "*" at -1773.45,1356.41 h50 r180